# Altium PCB 0.PCB1.PcbDoc (part 5 of 8)
Units mil, origin at the board's own origin, x right, y up, seen from the top; angles counter-clockwise.
Board outline 3897.64 x 3897.64 mil, 6 copper layers (Top Layer, Layer 1, Layer 3, Layer 4, Layer 2, Bottom Layer), stack 60.567 mil thick; 715 components, 563 nets, 2530 pads, 1442 vias.
Unrouted connection lines stored in the file: 6.
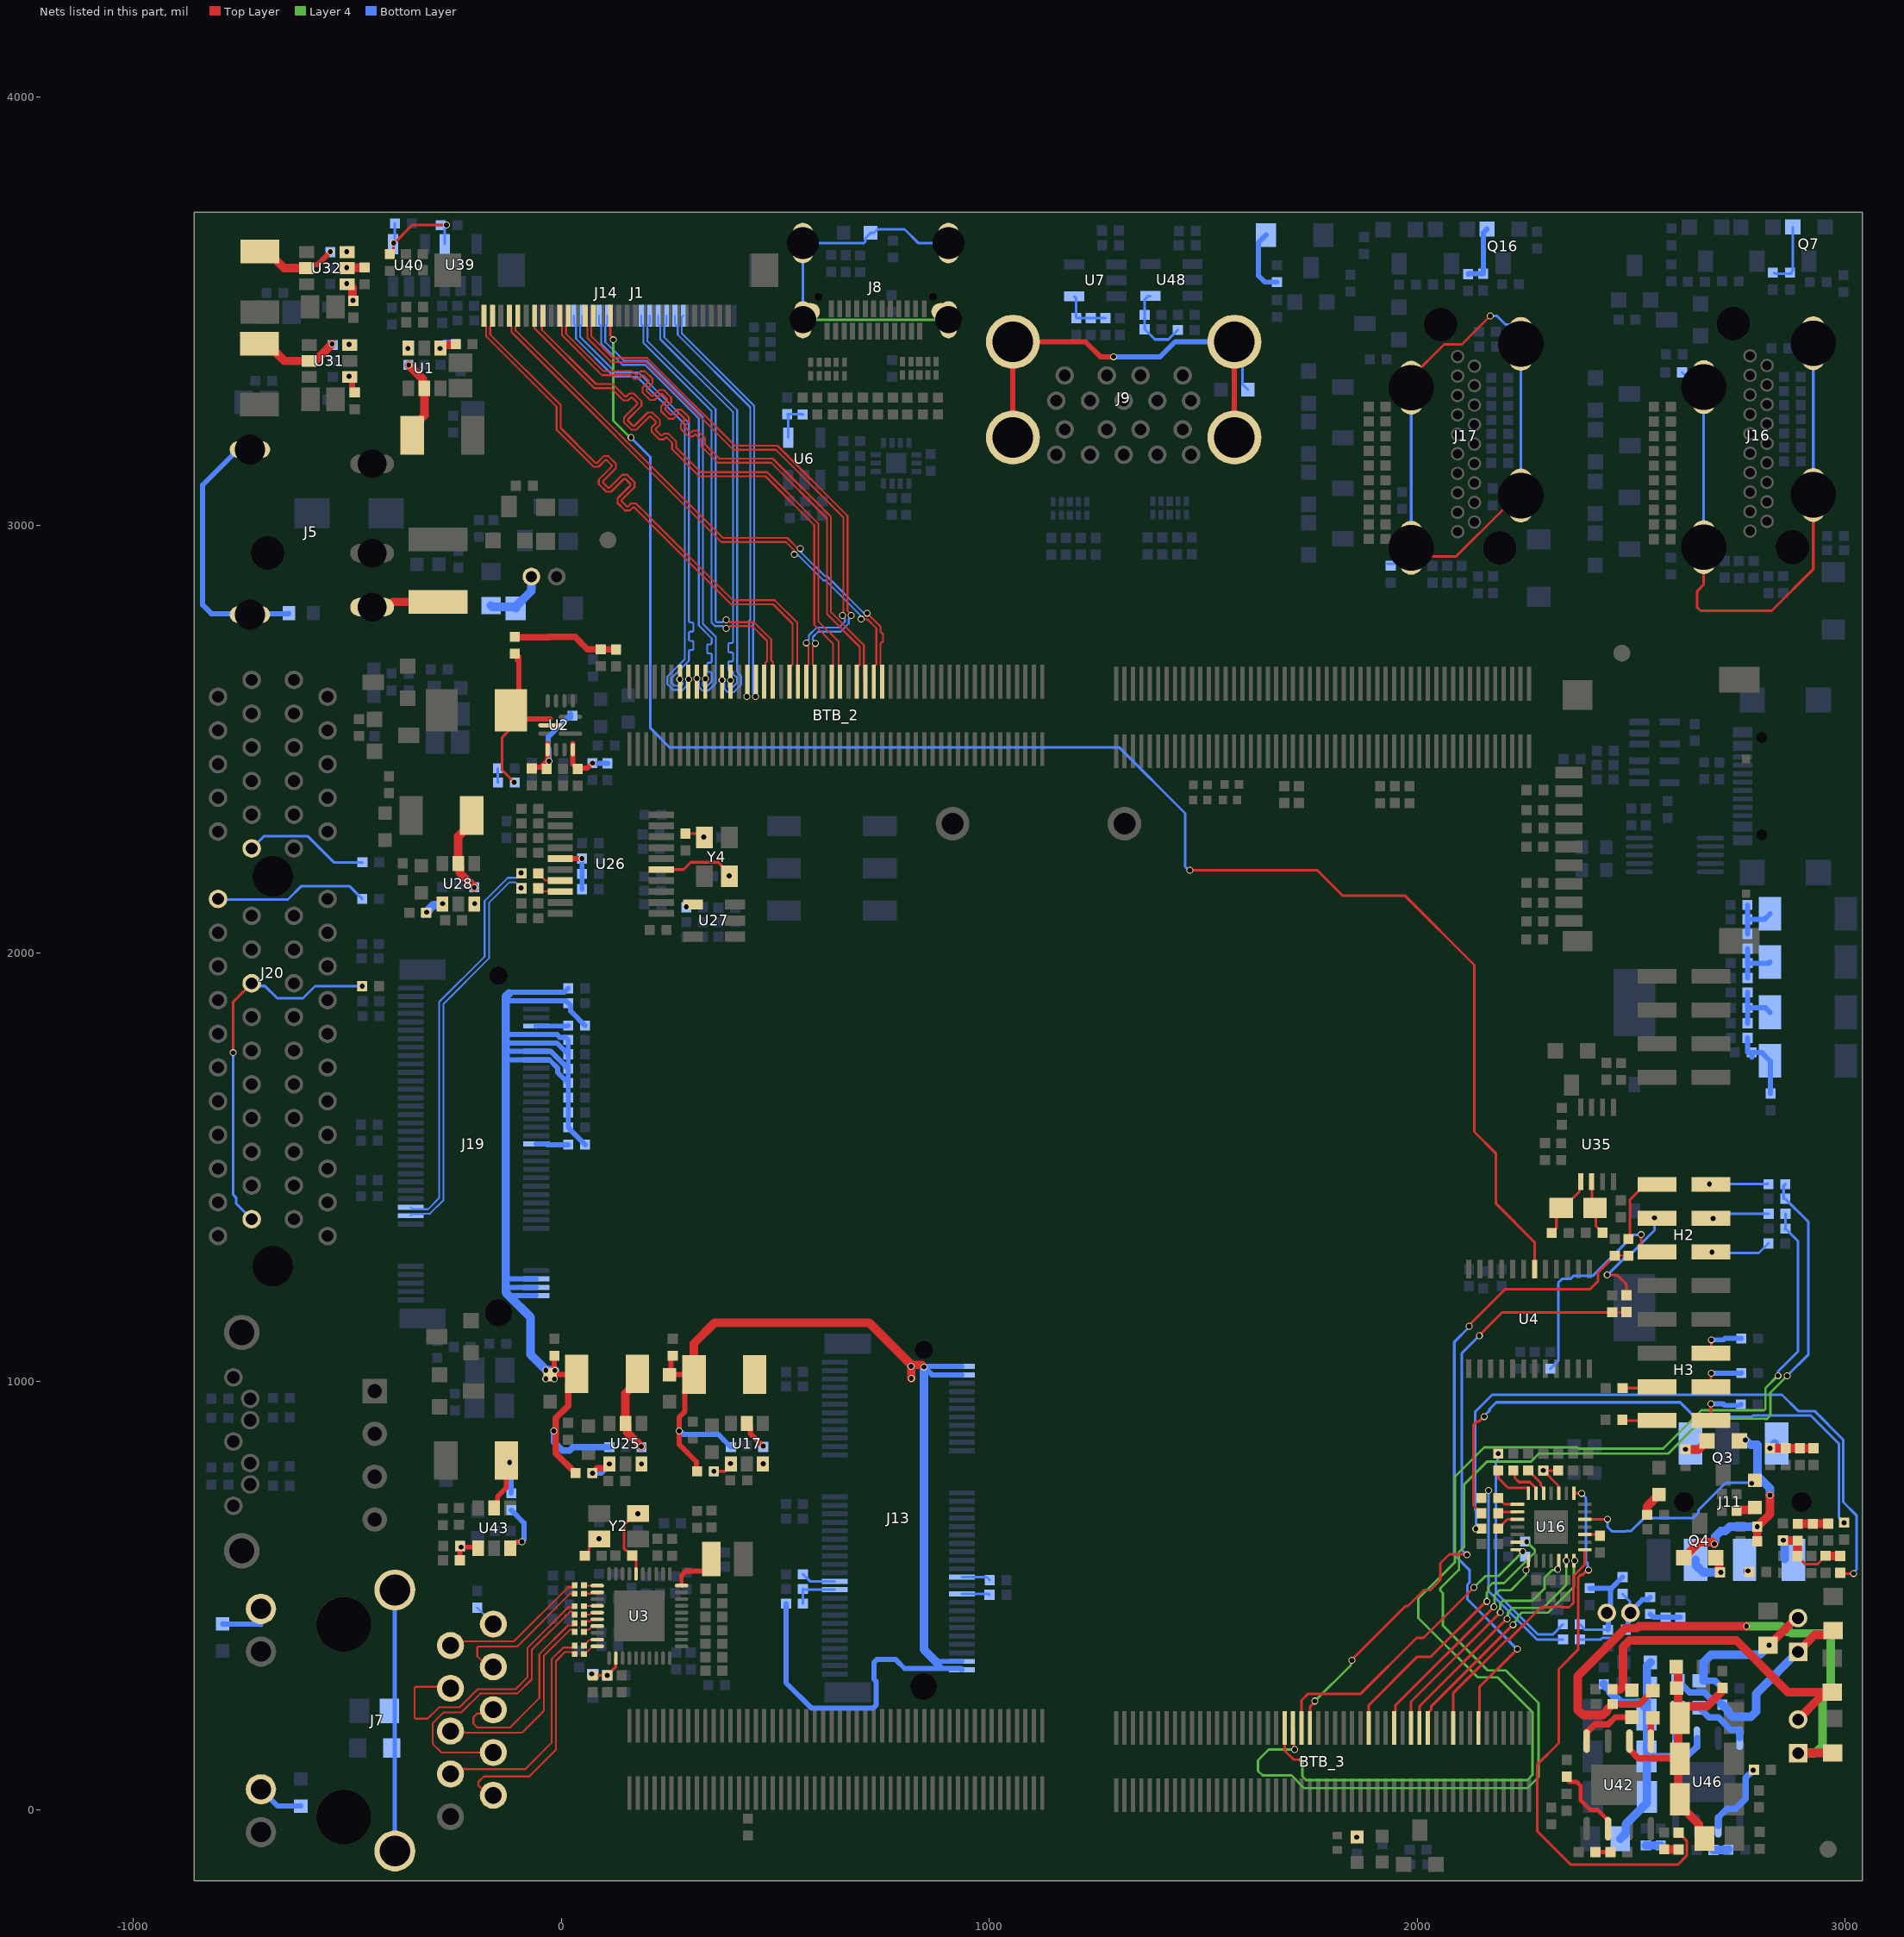
[diagram p9: the nets of this part, all layers, seen from the top]

## Via types
v1: diameter 16.14, hole 11.81, Top Layer to Bottom Layer, tented both sides, 1434 vias
v2: diameter 16.14, hole 11.81, Top Layer to Bottom Layer, 8 vias

## Nets (pads, with @x,y where several pads share a name; then routed paths per layer and width w, separated by ;. In a path a pad name is that pad's centre, name@x,y a point inside that pad or via, vN(x,y) a via of type N, cw(c..) or ccw(c..) an arc to the next point about the centre after c; other vN are vias at no path point) (continued)
I2C5_SCL_M3: BTB_3.24 R27.2 R111.2 | length 1495.4
  Top Layer w4: R27.2@2455.6,1161.52 2488.6,1161.52 R111.2@2489,1161.92
  Top Layer w6.16: BTB_3.24@1749.24,190.65 1749.76,191.17 1749.76,240.35 1761.2,251.79 v1(1761.2,253.4) ; v1(1847.2,348.22) 1847.2,349.7 1973,475.5 1978.4,475.5 2015.5,512.6 2030.7,512.6 2054.1,536 2054.1,575.1 2075.15,596.15 2114.85,596.15 v1(2116.2,594.8) ; v1(2145.1,1106.6) 2145.1,1107.6 2199.02,1161.52 R27.2@2455.6,1161.52
  Layer 4 w5.61: v1(1761.2,253.4) 1845.18,337.38 1845.18,346.21 v1(1847.2,348.22)
  Bottom Layer w6.16: v1(2116.2,594.8) 2104,607 2104,1065.5 v1(2145.1,1106.6)
I2C5_SDA_M3: BTB_3.44 R28.2 R194.2 | length 1490.2
  Top Layer w4: R28.2@2467.5,1293.7 2467.68,1293.52 R194.2@2500.7,1293.52
  Top Layer w6.16: v1(2121.4,1129) 2121.4,1131.1 2205.7,1215.4 2403.8,1215.4 2422.1,1233.7 2422.1,1253.62 R28.2@2461.7,1293.22 ; BTB_3.44@2145.3,209.2 2145.3,286 v1(2233.8,374.5)
  Bottom Layer w6.16: v1(2121.4,1129) 2121.4,1126.84 2086.6,1092.04 2086.6,595.2 2122.14,559.66 2122.14,529.79 2117.44,525.09 2117.44,490.86 v1(2233.8,374.5)
I2C7_SCL_M0: BTB_3.23 R29.2 U16.28 | length 740.2
  Top Layer w6.16: BTB_3.23@1729.56,190.65 1729.56,254.96 1745.02,270.42 1868.08,270.42 1998.68,401.02 2014.79,401.02 v1(2132.59,518.81) ; U16.28@2234.23,606.77 2243.11,606.77 2246.61,603.27 v1(2246.61,602.03)
  Layer 4 w5.61: v1(2132.59,518.81) 2159.27,545.5 2190.08,545.5 v1(2246.61,602.03)
I2C7_SDA_M0: BTB_3.31 R30.2 U16.27 | length 661.3
  Top Layer w6.16: BTB_3.31@1887.04,190.65 1887.04,243.77 2000.17,356.9 2031.8,356.9 2160.89,485.99 v1(2163.11,485.99) ; U16.27@2234.23,624.49 2254.89,624.49 v1(2255.7,625.3)
  Layer 4 w5.61: v1(2163.11,485.99) 2162.7,486.39 2162.7,506.39 2166.11,509.8 2166.11,519.51 2175.6,529 2202.8,529 2275.08,601.28 2275.08,605.92 v1(2255.7,625.3)
I2C8_SCL_M2: BTB_3.21 R31.2 R110.1 | length 2858.4
  Top Layer w5.61: BTB_3.21@1690.3,195.7 1690.3,137.3 1711.2,116.4 v1(1731.5,116.4)
  Layer 4 w5.61: v1(1731.5,116.4) 1731.5,77.8 1740.4,68.9 2257,68.9 2269.4,81.3 2269.4,227.2 2187.9,308.7 2141.2,308.7 2002.6,447.3 2002.6,492.4 2087.89,577.69 2087.89,777.19 2156.88,846.18 2374.28,846.18 2377.47,843 2574.8,843 2664.3,932.5 2810.11,932.5 2813.4,935.79 2813.4,983.98 v1(2842.9,1013.48)
  Bottom Layer w6.16: v1(2842.9,1013.48) 2842.9,1023 2889.7,1069.8 2889.7,1327.8 R31.2@2860.5,1357 ; R31.2@2858.1,1355.7 2860.38,1357.98 R110.1@2860.38,1391.7
I2C8_SDA_M2: BTB_3.22 R32.2 R193.1 | length 3065.3
  Top Layer w6.16: BTB_3.22@1709.5,191.5 1711.59,189.41 1711.59,142.21 v1(1713.3,140.5)
  Layer 4 w5.61: v1(1713.3,140.5) 1712.8,140 1652.9,140 1628.1,115.2 1628.1,90.1 1638.7,79.5 1706.4,79.5 1736,49.9 2257.2,49.9 2283.2,75.9 2283.2,248.5 2206.7,325 2164.8,325 2060.1,429.7 2060.1,505.7 2054.02,511.78 2054.02,516.42 2097.5,559.9 2097.5,601.1 2109.7,613.3 2109.7,759 2163.21,812.51 2265.82,812.51 2284.82,831.51 2587.11,831.51 2668.4,912.8 2812.6,912.8 2812.78,912.62 2817.42,912.62 2825.39,920.59 2825.39,974.19 v1(2864.5,1013.3)
  Bottom Layer w6.16: R32.2@2855.9,1426.7 2855.9,1456.82 R193.1@2859.88,1460.8 ; R32.2@2859.8,1426.7 2914,1372.5 2914,1062.8 v1(2864.5,1013.3)
I2S0_LRCK: BTB_3.38 U16.7 | length 569
  Top Layer w6.16: BTB_3.38@2024.83,190.65 2024.83,225.1 2032.52,232.79 2032.52,240.52 v1@2223.58,431.58
  Layer 4 w5.61: v1(2223.62,431.58) 2223.62,433.51 2234.81,444.7 2234.81,450.71 2243.91,459.81 2305.81,459.81 2366.12,520.12 2366.12,579.22 v1(2368.08,581.18)
I2S0_MCLK: BTB_3.34 U16.1 | length 536.3
  Top Layer w6.16: BTB_3.34@1946.09,190.65 1947.94,192.49 1947.94,229.64 1948.85,230.55 1948.85,242.85 v1(2179.2,473.2) ; v1(2254.4,558.8) 2256.31,560.71 2256.31,565.39 2259.82,568.9 U16.1@2259.82,581.18
  Layer 4 w5.61: v1(2179.2,473.2) 2180.88,474.88 2180.88,501.28 2191.7,512.1 2218.7,512.1 2254.4,547.8 v1(2254.4,558.8)
I2S0_SCLK: BTB_3.36 U16.5 | length 561.3
  Top Layer w6.16: BTB_3.36@1985.46,190.65 1985.46,251.72 v1(2194.24,460.49)
  Layer 4 w5.61: v1(2194.24,460.49) 2194.08,460.65 2194.08,481.38 2200.2,487.5 2268.86,487.5 2297.5,516.14 2297.5,541.5 2315.5,559.5 2326.47,559.5 v1(2328.24,561.27)
  Bottom Layer w6.16: v1(2328.24,561.27) v1@2329.6,562.63
I2S0_SDI0: BTB_3.41 U16.8 | length 586.4
  Top Layer w6.16: BTB_3.41@2083.89,190.65 2083.89,271.52 2207.82,395.45 2212.65,395.45 2289.58,472.38 2318.73,472.38 2320.73,474.38 2334.87,474.38 2336.87,472.38 2354.93,472.38 2364.69,482.14 2364.69,544.99 2391.71,572.01 U16.8@2391.71,606.77
I2S0_SDO0: BTB_3.37 U16.6 | length 574.6
  Top Layer w6.16: BTB_3.37@2005.15,190.65 2005.15,240.95 v1(2209.7,445.5)
  Layer 4 w5.61: v1(2209.7,445.5) 2211.72,447.52 2211.72,460.02 2222.45,470.75 2294.05,470.75 2348.4,525.1 v1(2348.4,581.18)
LCD0_RST: J14.15 U4.18 | length 4002.7
  Top Layer w6.16: J14.15@115.13,3489.52 115.13,3442.77 122,3435.9 v1(122,3433.2) ; v1(1469.2,2194) 1766.6,2194 1826.3,2134.3 1971.9,2134.3 2133.6,1972.6 2133.6,1583.1 2183.5,1533.2 2183.5,1416.1 2274.58,1325.02 U4.18@2274.58,1259.48
  Layer 4 w5.61: v1(122,3433.2) 122,3244.1 160.94,3205.16 v1(163.46,3205.16)
  Bottom Layer w6.16: v1(163.46,3205.16) 163.46,3204.14 207.9,3159.7 207.9,2526.8 253.81,2480.89 1304.21,2480.89 1457.9,2327.2 1457.9,2202.08 1461.51,2198.47 1462.03,2198.47 1466.5,2194 v1(1469.2,2194)
LOUT1: C122.1 U16.12 | length 476.7
  Top Layer w6.16: U16.12@2391.71,677.64 2392,677.93 2444.41,677.93 v1(2444.71,678.22) ; v1(2781.24,761.89) 2781.24,762.17 2780.15,763.26 2785.51,768.62 C122.1@2788.81,768.62
  Bottom Layer w6.16: v1(2444.71,678.22) 2444.71,660.32 2455.81,649.22 2486.51,649.22 2487.91,650.62 2499.55,650.62 2529.46,680.54 2644.34,680.54 2657,693.2 2657,699.61 2720.65,763.26 2780.15,763.26 2781.24,762.17 v1(2781.24,761.89)
LOUT2: C279.1 U16.15 | length 1319.6
  Top Layer w6.16: U16.15@2366.12,738.66 v1(2384.12,738.66) ; v1(2400.49,559.37) 2397.79,559.37 2386.9,548.48 2382.54,548.48 2375.89,541.82 2375.89,373 2330.61,327.72 2330.61,155.25 2280.71,105.35 2280.71,-50.99 2358.41,-128.69 2609.16,-128.69 2629.59,-108.26 2629.59,-73.05 C279.1@2610.71,-54.17
  Bottom Layer w6.16: v1(2384.12,738.66) 2394.31,728.47 2394.31,579.76 2398.58,575.48 2398.58,561.28 v1(2400.49,559.37)
M2EKEY_3V3: C128.2 C129.1 C130.1 J13.2 J13.4 J13.72 J13.74 L25.2 R138.2 R147.1 | length 2871.9
  Top Layer w12: C129.1@256.87,1017.9 256.97,1018 256.97,1056.32 C130.1@260.77,1060.12 ; C129.1@261.17,1016.5 261.97,1015.7 310.03,1015.7 L25.2@310.23,1015.9 ; L25.2@309.07,997.1 288.67,976.7 288.67,929.3 276.07,916.7 v1(276.07,884.57) 276.07,852.44 315.69,812.82 315.69,791.76 R138.2@317.41,790.05
  Top Layer w20: L25.2@310.23,1015.9 310.23,1088.73 358.8,1137.3 719.3,1137.3 817.83,1038.77 v1@842.93,1038.77 ; v1(817.8,1035.5) 818,1035.3 v1(818,1006.9)
  Bottom Layer w12: v1(276.07,884.57) 277,884.57 285.17,876.4 366.87,876.4 379.5,863.78 379.5,863.46 C128.2@396.5,846.46 ; R147.1@525.61,480.75 525.61,295.89 584.5,237 729.27,237 736.3,244.03 736.3,298.56 730.5,304.36 730.5,343.37 737.53,350.4 781.5,350.4 802.4,329.5 891.8,329.5 ; v1(848,1033.7) v1@848.21,1033.7 ; J13.74@935.6,326.49 936.35,326.49 J13.74@936.45,326.39 ; J13.74@935.6,329.5 891.8,329.5 ; J13.72@936.45,346.08 879.78,346.08 877.5,343.8 891.8,329.5 ; J13.4@936.45,1015.37 866.54,1015.37 v1@848.21,1033.7 ; J13.2@936.45,1035.06 850.48,1035.06 849.12,1033.7 v1@848.21,1033.7
  Bottom Layer w20: v1(848,1033.7) 848,373.3 877.5,343.8
M2PCIE_3V3: C157.2 C158.1 C159.1 C169.1 C170.1 C171.1 C172.1 C173.1 C174.1 C181.1 C182.1 C183.1 J19.2 J19.4 J19.12 J19.14 J19.16 J19.18 J19.70 J19.72 J19.74 L16.2 R218.2 R236.2 R237.2 | length 2971.7
  Top Layer w12: C159.1@-15.9,1060.12 -15.9,1031.55 -15.39,1031.04 C158.1@-15.39,1027.61 ; v1(-14.6,1025.7) -16.1,1025.7 C158.1@-26,1015.8 L16.2@34.46,1015.8
  Top Layer w15: C157.2@33.74,785.8 -13.1,832.64 -13.1,913.84 16.2,943.14 16.2,997.54 34.46,1015.8 L16.2@36.26,1017.6
  Bottom Layer w12: -129.5,1220.9 -128.45,1219.85 J19.72@-58.2,1219.85 ; -129.5,1241.7 -127.34,1239.54 J19.70@-58.2,1239.54 ; -129.5,1752.7 -128.15,1751.35 J19.18@-58.2,1751.35 -58.11,1751.26 -27.23,1751.26 -8.3,1732.33 -8.3,1721.93 C173.1@16.42,1697.2 ; -129.5,1772.7 -127.84,1771.04 J19.16@-58.2,1771.04 -58.11,1770.94 -23.82,1770.94 C171.1@16.42,1730.7 ; -129.5,1787 -125.78,1790.72 J19.14@-58.2,1790.72 -10.1,1790.72 C174.1@16.42,1764.2 ; -129.5,1807.5 -126.59,1810.41 -90.38,1810.41 ; -129.5,1898.7 -119.95,1889.15 J19.4@-58.2,1889.15 -58.11,1889.06 11.07,1889.06 C170.1@16.42,1883.7 22.22,1877.9 22.22,1864.76 R236.2@55.78,1831.2 ; -121.8,1906.4 -119.37,1908.83 J19.2@-58.2,1908.83 7.06,1908.83 C169.1@16.42,1918.2 ; -120.62,1198.98 -119.43,1200.17 J19.74@-58.2,1200.17 ; -90.38,1810.5 -58.3,1810.5 J19.12@-58.2,1810.41 -9.69,1810.41 -2.78,1803.5 10.63,1803.5 C172.1@16.42,1797.7 16.53,1797.59 16.53,1593.91 C183.1@16.64,1593.8 22.44,1588 22.44,1586.56 R237.2@55.9,1553.1
  Bottom Layer w15: v1(-17,884.3) -16.78,884.08 -16.78,858.68 3.3,838.6 19.9,838.6 27.82,846.52 R218.2@112.8,846.52
  Bottom Layer w20: -121.8,1906.4 -129.5,1898.7 -129.5,1807.5 -129.5,1787 -129.5,1772.7 -129.5,1752.7 -129.5,1241.7 -129.5,1220.9 -129.5,1207.86 -120.62,1198.98 -71.22,1149.58 -71.22,1062.72 -35.78,1027.28 v1(-35.78,1026.4) -15.3,1026.4 v1(-14.6,1025.7)
  other v1: -35.9,1005.9 -15.8,1005.6
M2PCIE_REF_CLKN: J19.53 R229.2 R231.1 | length 930.5
  Bottom Layer w4.29: J19.53@-351.5,1406.86 -347.74,1403.1 -321.55,1403.1 -320.62,1402.16 -310.94,1402.16 -284.94,1428.16 -284.94,1886.31 -178.9,1992.35 -178.9,2122.05 -124.46,2176.49 -105.05,2176.49 -104.56,2176.98 -102.53,2176.98 -94.08,2185.43 v1(-94.08,2187.73)
M2PCIE_REF_CLKN_R: R229.1 U26.17 | length 58.2
  Top Layer w4.29: R229.1@-53.52,2186.63 -36.91,2170.02 U26.17@-2.19,2170.02
M2PCIE_REF_CLKP: J19.55 R228.2 R232.1 | length 930.1
  Bottom Layer w4.29: J19.55@-351.5,1387.18 -347.74,1390.94 -321.55,1390.94 -320.62,1391.87 -306.67,1391.87 -274.65,1423.9 -274.65,1882.05 -168.61,1988.09 -168.61,2117.79 -120.2,2166.2 -107.55,2166.2 -102.63,2161.29 -102.53,2161.29 -94.08,2152.83 v1(-94.08,2152.73)
M2PCIE_REF_CLKP_R: R228.1 U26.18 | length 54.3
  Top Layer w4.29: R228.1@-53.52,2151.63 -46.32,2144.43 U26.18@-2.19,2144.43
MDIN0_PHY1: R374.1 U3.2 | length 32.4
  Top Layer w4.29: R374.1@53.36,504.2 68.83,504.2 71.86,507.23 U3.2@84.46,507.23
MDIN0_PHY1_RJ45: J7.3 R374.2 | length 346.7
  Top Layer w4.29: J7.3@-158.9,334.4 -172.23,334.4 -195.8,357.97 -195.8,378.39 -193.29,380.9 -102.25,380.9 20.89,504.04 31.54,504.04 R374.2@31.7,504.2
MDIN1_PHY1: R376.1 U3.5 | length 33.1
  Top Layer w4.29: R376.1@53.36,455.1 66.98,455.1 71.86,459.98 U3.5@84.46,459.98
MDIN1_PHY1_RJ45: J7.7 R376.2 | length 680.7
  Top Layer w4.29: J7.7@-158.48,133.13 -279.55,133.13 -300.4,153.98 -300.4,200.9 -274.33,226.97 -232.7,226.97 -188.9,270.77 -102.1,270.77 -68.6,304.28 -68.6,372.9 20.36,461.86 24.94,461.86 R376.2@31.7,455.1
MDIN2_PHY1: R378.1 U3.7 | length 36.7
  Top Layer w4.29: R378.1@53.36,415 58.1,419.74 64.29,419.74 73.04,428.49 U3.7@84.46,428.49
MDIN2_PHY1_RJ45: J7.6 R378.2 | length 468.6
  Top Layer w4.29: J7.6@-258.48,183.13 -254.75,179.4 -91.35,179.4 -43.28,227.47 -43.28,227.83 -40.7,230.41 -40.7,358.69 20.41,419.8 24.44,419.8 24.5,419.74 26.95,419.74 R378.2@31.7,415
MDIN3_PHY1: R380.1 U3.10 | length 38.6
  Top Layer w4.29: R380.1@53.36,363.1 60.32,370.07 62.8,370.07 73.97,381.24 U3.10@84.46,381.24
MDIN3_PHY1_RJ45: J7.9 R380.2 | length 542.8
  Top Layer w4.29: J7.9@-169.1,31.8 -193.3,56 -193.3,64.6 -180.69,77.21 -74.64,77.21 -12.3,139.56 -12.3,346.55 9.11,367.95 24.44,367.95 24.55,367.84 26.95,367.84 R380.2@31.7,363.1 ; J7.9@-158.5,5 J7.9@-144.42,19.08 ; J7.9@-158.48,33.13 J7.9@-154.14,28.8
MDIP0_PHY1: R373.1 U3.1 | length 31.5
  Top Layer w4.29: R373.1@53.36,523.9 54.28,522.98 U3.1@84.46,522.98
MDIP0_PHY1_RJ45: J7.2 R373.2 | length 348.5
  Top Layer w4.29: J7.2@-258.48,383.13 -248.52,393.09 -109.86,393.09 16.21,519.15 26.95,519.15 R373.2@31.7,523.9
MDIP1_PHY1: R375.1 U3.4 | length 31.4
  Top Layer w4.29: R375.1@53.36,474.9 54.19,475.73 U3.4@84.46,475.73
MDIP1_PHY1_RJ45: J7.4 R375.2 | length 674.3
  Top Layer w4.29: J7.4@-266.9,286 -267.6,286.7 -340.19,286.7 -342.7,284.19 -342.7,214.51 -340.19,212 -312.3,212 -285.7,238.6 -237.66,238.6 -195.2,281.06 -106.37,281.06 -78.89,308.54 -78.89,377.16 16.1,472.15 28.95,472.15 R375.2@31.7,474.9 ; J7.4@-258.48,283.13 J7.4@-256.41,281.06
MDIP2_PHY1: R377.1 U3.6 | length 35
  Top Layer w4.29: R377.1@53.36,434.9 58.1,439.64 67.26,439.64 71.86,444.24 U3.6@84.46,444.24
MDIP2_PHY1_RJ45: J7.5 R377.2 | length 458.5
  Top Layer w4.29: J7.5@-169.6,232.1 -177.41,224.29 -196.41,224.29 -205,215.7 -205,200.9 -195.7,191.6 -119.69,191.6 -78.16,233.13 -50.99,260.3 -50.99,362.96 16.15,430.09 24.44,430.09 24.5,430.15 26.95,430.15 R377.2@31.7,434.9
MDIP3_PHY1: R379.1 U3.9 | length 36.9
  Top Layer w4.29: R379.1@53.36,383.1 66.42,396.16 83.62,396.16 U3.9@84.46,396.99
MDIP3_PHY1_RJ45: J7.8 R379.2 | length 528.9
  Top Layer w4.29: J7.8@-258.48,83.13 -247.31,94.3 -83.75,94.3 -22.59,155.46 -22.59,350.81 4.84,378.24 24.44,378.24 24.55,378.36 26.95,378.36 R379.2@31.7,383.1
MIC1N: C113.2 R117.2 | length 1325.2
  Top Layer w6.16: C113.2@2149.95,691.98 2131.07,710.86 2131.07,897.57 2139.56,906.06 2143.91,906.06 2155.68,917.83 v1(2156.62,917.83)
  Bottom Layer w6.16: v1(2156.62,917.83) 2156.62,919.53 2169.24,932.15 2169.24,935.74 2184.7,951.2 2614.41,951.2 2648.45,917.16 2781.96,917.16 2785.46,920.66 2918.97,920.66 2985.35,854.28 2985.35,682.62 2997.21,670.76 v1(2997.21,670)
MIC1P: C112.2 R114.2 | length 1554.3
  Top Layer w6.16: R114.2@2988.21,552.84 2989.73,551.32 v1(3019.71,551.32)
  Bottom Layer w6.16: v1(2136.9,655.5) 2137.2,655.8 2137.2,698.1 2135.6,699.7 2135.6,929.3 2175.1,968.8 2852.3,968.8 2890.28,930.82 2928.21,930.82 2995.51,863.52 2995.51,718.22 3026.31,687.42 3026.31,559.92 3019.71,553.32 v1(3019.71,551.32)
MIC2N: C117.2 R134.2 | length 533.6
  Bottom Layer w6.16: v1(2189.41,831.31) 2187.5,829.4 2187.5,814.44 2183.98,810.92 2183.98,620.73 2183.68,620.43 2183.68,507.42 2282.1,409 2317.28,409 R134.2@2340.63,432.35
MIC2P: C115.2 R130.2 | length 455.9
  Bottom Layer w6.16: v1(2166.78,745.08) 2166.78,509.85 2279.38,397.25 R130.2@2340.83,397.25
MIPI_DPHY0_RX_CLKN: BTB_2.13 J1.10 | length 1014
  Top Layer w4.42: BTB_2.13@395.71,2634.65 395.9,2634.84 v1(395.9,2637.6)
  Bottom Layer w4.42: J1.10@226.41,3489.66 226.41,3469.98 231.33,3465.05 231.33,3434.77 401.38,3264.72 401.38,2743.1 401.38,2727.25 398.79,2724.66 392.68,2724.66 390.53,2722.52 390.53,2705.38 392.68,2703.24 399.66,2703.24 401.8,2701.1 401.8,2683.96 399.66,2681.82 392.68,2681.82 390.53,2679.68 390.53,2662.54 392.68,2660.4 398.79,2660.4 401.38,2657.81 401.38,2655.6 401.38,2652.91 410.6,2643.69 410.6,2631.51 398.95,2619.86 393.44,2619.86 390.85,2622.45 390.85,2629.38 395.9,2634.43 v1(395.9,2637.6)
MIPI_DPHY0_RX_CLKP: BTB_2.12 J1.9 | length 1013.4
  Top Layer w4.42: v1(375.96,2637.86) 376.02,2637.79 BTB_2.12@376.02,2634.65
  Bottom Layer w4.42: J1.9@246.1,3489.66 246.1,3469.98 241.18,3465.05 241.18,3438.84 411.22,3268.8 411.22,2656.99 420.44,2647.77 420.44,2627.43 403.03,2610.02 389.36,2610.02 381.01,2618.38 381.01,2629.63 375.96,2634.68 v1(375.96,2637.86)
MIPI_DPHY0_RX_D0N: BTB_2.17 J1.12 | length 1035.4
  Top Layer w4.42: v1(385.9,2759.21) 389.07,2759.21 394.2,2764.35 446.65,2764.35 481.34,2729.66 481.34,2683.12 477.16,2678.94 477.16,2637.36 BTB_2.17@474.45,2634.65
  Bottom Layer w4.42: J1.12@187.04,3489.66 187.04,3469.98 192.15,3464.87 192.15,3454.55 192.48,3454.22 192.48,3442.38 192.15,3442.05 192.15,3426.15 351.32,3266.98 351.32,2772.45 359.43,2764.35 377.6,2764.35 382.73,2759.21 v1(385.9,2759.21)
MIPI_DPHY0_RX_D0P: BTB_2.18 J1.11 | length 1034
  Top Layer w4.42: v1(385.9,2778.9) 389.07,2778.9 394.2,2773.77 450.55,2773.77 490.76,2733.57 490.76,2684.58 494.13,2681.2 BTB_2.18@494.13,2634.65
  Bottom Layer w4.42: J1.11@206.73,3489.66 206.73,3469.98 201.57,3464.81 201.57,3458.45 201.9,3458.12 201.9,3438.48 201.57,3438.15 201.57,3430.06 360.74,3270.88 360.74,2776.36 363.33,2773.77 377.6,2773.77 382.73,2778.9 v1(385.9,2778.9)
MIPI_DPHY0_RX_D1N: BTB_2.15 J1.8 | length 1000.6
  Top Layer w4.42: v1(434.01,2600.1) 435.08,2601.16 BTB_2.15@435.08,2634.65
  Bottom Layer w4.42: J1.8@265.78,3489.66 265.78,3469.98 272.14,3463.62 272.14,3444.94 441.75,3275.33 441.75,2779.25 439.15,2776.65 439.15,2608.4 434.01,2603.27 v1(434.01,2600.1)
MIPI_DPHY0_RX_D1P: BTB_2.16 J1.7 | length 999.6
  Top Layer w4.42: v1(453.7,2600.1) 454.76,2601.16 BTB_2.16@454.76,2634.65
  Bottom Layer w4.42: J1.7@285.47,3489.66 281.77,3485.97 281.77,3463.91 281.56,3463.69 281.56,3448.84 451.17,3279.23 451.17,2775.35 448.57,2772.75 448.57,2608.4 453.7,2603.27 v1(453.7,2600.1)
MIPI_DPHY0_RX_D2N: BTB_2.10 J1.17 | length 1078
  Top Layer w4.42: BTB_2.10@336.65,2634.65 336.9,2634.9 v1(336.9,2640.9)
  Bottom Layer w4.42: J1.17@88.62,3489.66 88.62,3469.98 93.72,3464.87 93.72,3424.18 143.26,3374.64 196.14,3374.64 321.5,3249.28 321.5,2766.1 352,2735.6 352,2730.6 352,2724.45 349.41,2721.86 343.24,2721.86 341.1,2719.72 341.1,2702.58 343.24,2700.44 349.86,2700.44 352,2698.3 352,2681.16 349.86,2679.02 343.24,2679.02 341.1,2676.88 341.1,2659.74 343.24,2657.6 349.41,2657.6 352,2655.01 352,2652.8 352,2635.21 340.19,2623.4 333.78,2623.4 331.19,2625.98 331.19,2632.45 336.9,2638.16 v1(336.9,2640.9)
MIPI_DPHY0_RX_D2P: BTB_2.9 J1.16 | length 1078.1
  Top Layer w4.42: BTB_2.9@316.97,2634.65 317.25,2634.94 v1(317.25,2642.12)
  Bottom Layer w4.42: J1.16@108.3,3489.66 108.3,3469.98 103.14,3464.81 103.14,3428.08 147.16,3384.06 200.04,3384.06 330.92,3253.18 330.92,2770 361.42,2739.5 361.42,2631.31 344.09,2613.98 329.88,2613.98 321.77,2622.08 321.77,2634.43 317.25,2638.94 v1(317.25,2642.12)
MIPI_DPHY0_RX_D3N: BTB_2.8 J1.20 | length 1089.1
  Top Layer w4.42: BTB_2.8@297.4,2640.23 v1(297.64,2640.47)
  Bottom Layer w4.42: J1.20@29.56,3489.66 29.56,3469.98 34.72,3464.81 34.72,3436.18 123.76,3347.14 177.04,3347.14 289.1,3235.08 289.1,2687.43 248.18,2646.51 248.18,2628.6 261.23,2615.55 284.37,2615.55 292.81,2623.99 292.81,2632.48 297.64,2637.3 v1(297.64,2640.47)
MIPI_DPHY0_RX_D3P: BTB_2.7 J1.19 | length 1095.1
  Top Layer w4.42: v1(277.24,2640.01) 277.24,2635.01 BTB_2.7@277.6,2634.65
  Bottom Layer w4.42: J1.19@49.25,3489.66 49.25,3469.98 44.14,3464.87 44.14,3440.08 127.66,3356.56 180.94,3356.56 298.52,3238.98 298.52,2790.81 298.52,2775.47 301.11,2772.88 306.91,2772.88 309.05,2770.74 309.05,2753.6 306.91,2751.46 300.66,2751.46 298.52,2749.32 298.52,2732.18 300.66,2730.04 306.91,2730.04 309.05,2727.9 309.05,2710.76 306.91,2708.62 301.11,2708.62 298.52,2706.03 298.52,2683.53 297.39,2682.4 257.6,2642.61 257.6,2632.5 265.13,2624.97 280.47,2624.97 283.39,2627.89 283.39,2631.56 279.2,2635.75 v1@279.2,2641.3
MIPI_DPHY0_TX_CLKN: BTB_2.25 J14.24 | length 1400
  Top Layer w4.42: J14.24@-62.04,3489.52 J14.24@-62.04,3489.52 -62,3459.89 -51.44,3449.34 -51.44,3449.26 77.63,3320.19 116.69,3320.19 138.94,3297.94 145.21,3291.67 156.68,3291.67 163.04,3298.03 166.07,3298.03 178.18,3285.91 178.18,3282.88 146.68,3251.37 146.68,3240.54 164.31,3222.91 175.15,3222.91 206.19,3253.95 209.22,3253.95 221.34,3241.83 221.34,3238.8 211.66,3229.12 211.66,3218.29 229.29,3200.66 240.12,3200.66 243.91,3204.44 246.94,3204.44 259.05,3192.32 259.05,3189.29 259.05,3177.83 286.74,3150.14 322.39,3114.49 477.21,3114.49 591.34,3000.36 591.34,2767.26 635.4,2723.2 635.4,2674.4 634.64,2673.64 634.64,2637.36 BTB_2.25@631.93,2634.65
MIPI_DPHY0_TX_CLKP: BTB_2.26 J14.23 | length 1399
  Top Layer w4.42: J14.23@-42.35,3489.52 -44.78,3487.09 -44.78,3456.08 81.58,3329.72 116.85,3329.72 116.96,3329.61 120.59,3329.61 145.6,3304.6 149.11,3301.09 152.78,3301.09 159.14,3307.45 169.97,3307.45 187.6,3289.81 187.6,3278.98 156.1,3247.47 156.1,3244.44 168.21,3232.33 171.24,3232.33 202.29,3263.37 213.12,3263.37 230.76,3245.73 230.76,3234.9 221.08,3225.22 221.08,3222.19 233.19,3210.08 236.22,3210.08 240,3213.86 250.84,3213.86 268.47,3196.22 268.47,3185.39 268.47,3181.73 293.4,3156.8 326.29,3123.91 481.11,3123.91 600.76,3004.26 600.76,2775.86 648.14,2728.47 648.14,2674.4 648.9,2673.64 648.9,2637.36 BTB_2.26@651.61,2634.65
MIPI_DPHY0_TX_D0N: BTB_2.30 J14.27 | length 1316.6
  Top Layer w4.42: J14.27@-121.09,3489.52 -121.09,3469.84 -115.96,3464.71 -115.96,3451.06 374.22,2960.88 524.8,2960.88 543.21,2942.47 543.21,2933.39 v1(544.9,2931.7) ; v1(700.4,2780.7) 700.77,2780.33 715.64,2780.33 736.5,2759.47 736.5,2675.25 730.35,2669.1 BTB_2.30@730.35,2634.65
  Bottom Layer w4.42: v1(544.9,2931.7) 547.14,2929.46 554.38,2929.46 612.55,2871.29 617.42,2871.29 698.23,2790.48 698.23,2782.87 v1(700.4,2780.7)
MIPI_DPHY0_TX_D0P: BTB_2.31 J14.26 | length 1317.1
  Top Layer w4.42: J14.26@-101.41,3489.52 -101.41,3469.84 -106.54,3464.71 -106.54,3454.96 378.12,2970.3 528.7,2970.3 551.12,2947.88 556.77,2947.88 v1(559.02,2945.64) ; v1(714.68,2794.61) 745.92,2763.37 745.92,2753 745.92,2750.79 748.51,2748.2 749.9,2748.2 752.04,2746.06 752.04,2728.92 749.9,2726.78 748.51,2726.78 745.92,2724.19 745.92,2699.1 745.92,2673.22 750.04,2669.1 BTB_2.31@750.04,2634.65
  Bottom Layer w4.42: v1(559.02,2945.64) 561.24,2943.41 561.24,2935.91 616.45,2880.71 621.32,2880.71 705.18,2796.85 712.44,2796.85 v1(714.68,2794.61)
MIPI_DPHY0_TX_D1N: BTB_2.28 J14.21 | length 1400
  Top Layer w4.42: J14.21@-2.98,3489.52 -2.98,3469.84 2.18,3464.67 2.18,3443.53 95.32,3350.4 161.58,3350.4 163.35,3348.63 169.62,3342.35 181.09,3342.35 189,3350.27 192.03,3350.27 204.15,3338.15 204.15,3335.12 189.97,3320.95 189.97,3310.11 207.61,3292.48 218.44,3292.48 232.62,3306.65 235.65,3306.65 247.76,3294.54 247.76,3291.51 233.59,3277.33 233.59,3266.5 251.22,3248.86 262.06,3248.86 273.81,3260.62 276.84,3260.62 288.96,3248.5 288.96,3245.47 279.68,3236.2 279.68,3225.36 297.32,3207.73 308.15,3207.73 311.93,3211.51 314.96,3211.51 327.08,3199.4 327.08,3196.37 327.08,3184.9 335.74,3176.24 365.78,3146.2 490.5,3146.2 621,3015.7 621,2792.59 697.8,2715.79 697.8,2674.4 695.21,2671.81 693.7,2671.81 690.98,2669.1 BTB_2.28@690.98,2634.65
MIPI_DPHY0_TX_D1P: BTB_2.29 J14.20 | length 1397.7
  Top Layer w4.42: J14.20@16.7,3489.52 16.7,3469.84 11.6,3464.74 11.6,3447.44 99.22,3359.82 165.48,3359.82 170.01,3355.29 173.53,3351.77 177.19,3351.77 185.1,3359.69 195.93,3359.69 213.57,3342.05 213.57,3331.22 199.39,3317.05 199.39,3314.02 211.51,3301.9 214.54,3301.9 228.72,3316.07 239.55,3316.07 257.18,3298.44 257.18,3287.61 243.01,3273.43 243.01,3270.4 255.13,3258.28 258.16,3258.28 269.91,3270.04 280.74,3270.04 298.38,3252.41 298.38,3241.57 289.1,3232.3 289.1,3229.27 301.22,3217.15 304.25,3217.15 308.03,3220.93 318.86,3220.93 336.5,3203.3 336.5,3192.46 336.5,3188.8 342.4,3182.9 369.68,3155.62 494.4,3155.62 630.42,3019.6 630.42,2796.49 707.22,2719.69 707.22,2674.4 707.96,2673.66 707.96,2637.36 BTB_2.29@710.67,2634.65
MIPI_DPHY0_TX_D2N: BTB_2.22 J14.18 | length 1282.4
  Top Layer w4.42: J14.18@56.07,3489.52 56.07,3469.84 61.21,3464.7 61.21,3436.97 116.7,3381.48 196.9,3381.48 402.08,3176.3 501.6,3176.3 659.55,3018.35 659.55,2791.43 v1(657.61,2789.5) ; BTB_2.22@572.87,2634.65 572.87,2669.1 577.67,2673.89 577.67,2684.84 578.12,2685.29 578.12,2716.78 572.87,2722.03 v1(572.87,2725.2)
  Bottom Layer w4.42: v1@576.4,2727.5 575.38,2728.52 575.38,2730.35 578.68,2733.65 578.68,2742.73 596.73,2760.77 649.08,2760.77 662.75,2774.44 662.75,2781.19 657.61,2786.33 v1(657.61,2789.5)
MIPI_DPHY0_TX_D2P: BTB_2.23 J14.17 | length 1288.1
  Top Layer w4.42: J14.17@75.76,3489.52 75.76,3469.84 70.63,3464.7 70.63,3440.87 120.6,3390.9 200.8,3390.9 405.98,3185.72 505.5,3185.72 668.97,3022.26 668.97,2800.23 677.3,2791.9 v1(677.3,2789.5) ; BTB_2.23@592.56,2634.65 592.56,2669.1 587.77,2673.89 587.77,2715.22 593.91,2721.37 v1(593.91,2724.12)
  Bottom Layer w4.42: v1(593.91,2724.12) 593.91,2726.77 588.1,2732.57 588.1,2738.83 600.63,2751.35 652.98,2751.35 672.17,2770.54 672.17,2781.19 677.3,2786.33 v1(677.3,2789.5)
MIPI_DPHY0_TX_D3N: BTB_2.20 J14.30 | length 1396.3
  Top Layer w4.42: J14.30@-180.15,3489.52 -180.15,3469.84 -174.98,3464.67 -174.98,3441.28 -10.6,3276.9 -10.6,3223.1 69.85,3142.65 73.36,3139.14 76.12,3136.38 87.59,3136.38 103.26,3152.05 106.29,3152.05 118.41,3139.93 118.41,3136.9 88.1,3106.59 88.1,3095.76 105.73,3078.13 116.56,3078.13 146.88,3108.44 149.9,3108.44 162.02,3096.32 162.02,3093.29 131.71,3062.98 131.71,3052.15 149.35,3034.51 160.18,3034.51 167.25,3041.59 170.91,3041.59 193.09,3019.41 196.6,3015.9 397.12,2815.38 495.12,2815.38 540.6,2769.9 540.6,2674.4 538.01,2671.81 536.22,2671.81 533.5,2669.1 BTB_2.20@533.5,2634.65
MIPI_DPHY0_TX_D3P: BTB_2.21 J14.29 | length 1432.6
  Top Layer w4.42: J14.29@-160.45,3489.52 -160.45,3469.84 -165.56,3464.73 -165.56,3445.19 -1.18,3280.8 -1.18,3227 76.51,3149.31 80.02,3145.8 83.69,3145.8 99.36,3161.47 110.19,3161.47 127.83,3143.84 127.83,3133 97.52,3102.69 97.52,3099.66 109.63,3087.54 112.66,3087.54 142.97,3117.86 153.81,3117.86 171.44,3100.22 171.44,3089.39 141.13,3059.08 141.13,3056.05 153.25,3043.93 156.28,3043.93 163.35,3051.01 174.82,3051.01 199.75,3026.07 203.26,3022.56 401.02,2824.8 499.02,2824.8 551.5,2772.32 551.5,2636.34 BTB_2.21@553.19,2634.65 ; BTB_2.21@550.48,2637.36 BTB_2.21@550.48,2673.78 ; BTB_2.21@551.3,2663.6 BTB_2.21@553.19,2665.49
NetC4_1: C4.1 D2.2 R1.1 SW1.2 | length 182.3
  Bottom Layer w12: D2.2@2772,1802.5 2772.15,1802.35 2772.15,1768.75 2772.3,1768.6 R1.1@2781.58,1768.6 ; 2781.58,1757 R1.1@2781.58,1768.6 ; C4.1@2825.4,1672.78 2825.4,1747.73 SW1.2@2824.23,1748.9 2804.53,1768.6 R1.1@2781.58,1768.6
NetC5_1: C5.1 D3.2 R2.1 SW2.2 | length 128.8
  Bottom Layer w12: R2.1@2771.98,1836.6 D3.2@2771.98,1872.7 ; C5.1@2771.98,1908.8 D3.2@2771.98,1872.7 ; SW2.2@2824.23,1862.3 2813.83,1872.7 D3.2@2771.98,1872.7
NetC6_1: C6.1 U1.6
  other v1: -358.1,3413.07
NetC6_2: C6.2 L2.1 U1.2 | length 191.3
  Top Layer w20: v1(-355.9,3374.12) -323.38,3341.6 -323.38,3323.56 U1.2@-319.6,3319.78 -319.6,3256.14 -348.3,3227.44 L2.1@-348.3,3209.72
NetC7_1: C7.1 R4.1 R7.1 U1.4 | length 82.9
  Top Layer w20: v1(-283.3,3413.07) -283.3,3416.55 -278.42,3421.42 -248.06,3421.42 R4.1@-246.26,3423.22
  Bottom Layer w20: R7.1@-282.2,3414.27 -273.24,3423.22 C7.1@-246.26,3423.22
NetC14_1: C14.1 U32.6
  other v1: -501.07,3639.18
NetC14_2: C14.2 L21.1 U32.2 | length 195.7
  Top Layer w12: U32.2@-592.5,3600.8 -584.84,3608.46 -569.44,3608.46 v1(-539.2,3638.7)
  Top Layer w20: L21.1@-704.31,3639.67 -686.59,3639.67 -647.6,3600.68 U32.2@-594.35,3600.68
  Bottom Layer w12: C14.2@-539.23,3638.08 v1(-539.2,3638.7)
NetC15_1: C15.1 D4.2 R5.1 SW3.2 | length 122.1
  Bottom Layer w12: C15.1@2771.68,1942.4 2771.78,1942.5 R5.1@2771.78,1977 ; D4.2@2771.88,2010.9 2771.78,2010.8 R5.1@2771.78,1977 ; SW3.2@2824.23,1979.5 2821.73,1977 R5.1@2771.78,1977
NetC16_1: C16.1 R8.2 | length 33.1
  Bottom Layer w6.16: R8.2@-147.67,2432.09 -147.67,2399.29 C16.1@-147.47,2399.09
NetC16_2: C16.2 L3.1 R10.1 U2.7 | length 402.3
  Top Layer w6.16: L3.1@-117.99,2524.29 -137.79,2504.49 -137.79,2427.79 v1(-109.59,2399.59)
  Top Layer w12: L3.1@-117.99,2524.29 L3.1@-95.19,2547.09 ; L3.1@-117.3,2567.4 L3.1@-117.3,2579.21 ; R10.1@-109.5,2703.3 -102.8,2696.6 -102.8,2685.9 -98.8,2681.9 ; R10.1@-100,2693.8 -98.8,2692.6 -98.8,2681.9 ; L3.1@-97.1,2602.2 -98.8,2603.9 -98.8,2681.9 ; L3.1@-86.59,2567.4 -86.59,2555.69 L3.1@-95.19,2547.09 ; -25.71,2547.09 L3.1@-95.19,2547.09
  Bottom Layer w6.16: v1(-109.59,2399.59) -109.09,2399.09 C16.2@-108.11,2399.09
NetC20_1: C20.1 R10.2 R13.2 | length 246.9
  Top Layer w15: R10.2@-104.5,2741.6 -104.5,2738.9 -104.3,2738.7 -27.4,2738.7 -27.1,2739 32.3,2739 61.32,2709.98 C20.1@92.6,2709.98 ; C20.1@93.5,2709.1 94.23,2709.83 127.85,2709.83 R13.2@128,2709.68
NetC25_1: C25.1 R14.1 R15.1 U2.9 | length 225.2
  Top Layer w12: R14.1@-68.16,2431.2 -64.41,2434.95 -46.93,2434.95 -34.79,2447.09 -34.3,2447.09 -33.51,2447.87 -28.71,2447.87 v1(-27.92,2448.67) ; v1@-31.62,2449.77 U2.9@-31.65,2475.7 U2.9@-31.62,2490
  Bottom Layer w12: v1(-27.92,2448.67) -27.92,2477.54 -30,2479.62 -30,2505.15 14.17,2549.32 21,2549.32 22.27,2550.59 R15.1@22.27,2559.65
NetC26_1: C26.1 R9.2 R16.1 U2.12 | length 137.8
  Top Layer w12: U2.12@27.44,2490 27.44,2441.89 36.52,2432.8 61.56,2432.8 v1(73.11,2444.35)
  Bottom Layer w12: v1(73.11,2444.35) 73.4,2444.06 108.02,2444.06 R16.1@108.31,2443.77
NetC28_1: C28.1 D6.2 R19.1 SW4.2 | length 125.9
  Bottom Layer w12: C28.1@2771.48,2113.03 2771.53,2112.98 R19.1@2771.53,2079.5 ; D6.2@2771.58,2045.1 D6.2@2771.58,2045.1 R19.1@2771.53,2079.5 ; SW4.2@2824.23,2092.1 2811.63,2079.5 R19.1@2771.53,2079.5
NetC54_1: C54.1 R387.1 Y2.1 | length 56.8
  Top Layer w6.16: R387.1@55.22,592.71 63.94,601.43 63.94,607.41 66.2,609.67 66.2,615.57 82.8,632.18 v1(88.71,632.18)
NetC55_1: C55.1 R386.2 U3.36 Y2.3 | length 171.2
  Top Layer w6.16: U3.36@175.02,550.54 175.02,584.1 153.7,605.41 150.74,605.41 146.59,609.56 146.59,663.74 156.75,673.9 156.75,674.63 173.35,691.24 v1(179.26,691.24)
NetC56_1: C56.1 J7.1 | length 53
  Bottom Layer w5.15: C56.1@-195.9,471.22 -160.1,435.42 J7.1@-160.1,433
NetC57_1: C57.1 J7.15 J7.16 R71.1 | length 609.8
  Bottom Layer w10: J7.16@-388.42,-133.22 J7.15@-388.42,476.62
NetC58_1: C58.1 D7.2 R69.2 R70.2 U3.12 | length 86.2
  Top Layer w6.16: v1(71.72,316.79) 75.23,313.28 v1(107.86,313.28) 127.29,332.71 127.29,353.2 U3.12@127.77,353.68
NetC86_1: C86.1 R93.2 U6.4 | length 92
  Bottom Layer w6.16: U6.4@530.6,3204.81 530.6,3256.93 C86.1@528.12,3259.4 563.82,3259.4 R93.2@564.3,3258.92
NetC89_1: C89.1 R33.2 R96.2 U7.4 | length 120.4
  Bottom Layer w6.16: U7.4@1198.79,3534.63 1203.4,3530.02 C89.1@1203.4,3484.11 R96.2@1237.43,3484.11 R33.2@1271.4,3484.11
NetC106_1: C106.1 C107.1 R112.1 U16.17 | length 103.3
  Top Layer w6.16: C106.1@2329.41,791.95 v1(2294.41,791.95) 2329.83,756.53 2329.83,739.52 U16.17@2330.69,738.66
NetC111_1: C111.1 R113.1 R115.1 | length 68.3
  Top Layer w20: R115.1@2889.01,667.4 R113.1@2924.31,667.4 2955.93,667.4 C111.1@2956.91,666.42
NetC112_1: C112.1 U16.24 | length 53.8
  Top Layer w6.16: C112.1@2189.31,656.21 2210.73,677.64 U16.24@2234.23,677.64
NetC113_1: C113.1 U16.23 | length 46.3
  Top Layer w6.16: C113.1@2189.31,691.98 2192.68,695.35 U16.23@2234.23,695.35
NetC115_1: C115.1 U16.22 | length 51
  Top Layer w6.16: C115.1@2189.31,727.75 2203.99,713.07 U16.22@2234.23,713.07
NetC116_1: C116.1 D82.2 J11.1 R114.1 R115.2 R116.1 | length 234.2
  Top Layer w6.16: R116.1@2888.51,592.6 2888.51,591.6 2901.93,578.18 2901.93,577.35 2906.07,573.2 2935.54,573.2 2939.89,577.56 2939.89,578.29 C116.1@2954.11,592.5
  Top Layer w20: D82.2@2854.41,628.62 2854.7,628.33 2889.22,628.33 2888.51,627.62 R116.1@2888.51,592.6 ; D82.2@2855.67,628.33 v1(2855.67,628.92) ; C116.1@2954.11,592.5 2954.26,592.35 2988.06,592.35 R114.1@2988.21,592.2
  Bottom Layer w20: v1(2855.67,628.92) 2858.54,626.05 J11.1@2858.54,584.77
NetC117_1: C117.1 U16.21 | length 109.5
  Top Layer w6.16: C117.1@2189.41,791.95 2189.41,774.63 2212.71,751.33 2258.96,751.33 2259.82,750.47 U16.21@2259.82,738.66
NetC118_1: C118.1 U16.20 | length 90.3
  Top Layer w6.16: C118.1@2224.41,791.95 2228.13,788.23 2228.13,774.52 2237.7,764.95 2263.23,764.95 2270.84,757.34 2270.84,757.17 2277.54,750.47 U16.20@2277.54,738.66
NetC119_1: C119.1 U16.19 | length 68.1
  Top Layer w6.16: C119.1@2259.41,791.95 2288.56,762.8 2288.56,757.16 2295.25,750.47 U16.19@2295.25,738.66
NetC120_1: C120.1 U16.10 | length 36.5
  Top Layer w6.16: U16.10@2391.71,642.2 2424.56,642.2 C120.1@2427.11,639.65
NetC122_2: C122.2 R122.2 | length 46.1
  Top Layer w20: R122.2@2746.11,697.44 2748.54,699.87 2783.06,699.87 C122.2@2788.81,705.62
NetC125_1: C125.1 R125.2 R126.1 | length 73.7
  Bottom Layer w12: R126.1@2544.35,456.54 2551.92,448.97 C125.1@2614.87,448.97
NetC126_1: C126.1 D83.2 P1.1 R126.2 R130.1 | length 265.9
  Bottom Layer w6.16: R130.1@2380.19,397.25 2428.82,397.25 2432.45,400.88 2468.26,400.88 D83.2@2487.61,420.23 ; C126.1@2479.61,503.52 2497.04,486.09 2497.04,460.33 P1.1@2498.17,459.2
  Bottom Layer w12: D83.2@2487.61,420.23 2492.89,425.51 2492.89,453.92 P1.1@2498.17,459.2 ; P1.1@2502.67,467 2503,467 2526.1,490.1 2538.55,490.1 R126.2@2544.35,495.9
NetC126_2: C126.2 D78.2 P1.2 R134.1 R136.1 | length 259.8
  Bottom Layer w6.16: R134.1@2379.99,432.35 2392.58,419.76 D78.2@2445.58,419.76
  Bottom Layer w12: R136.1@2403.05,517 2403.15,517.1 2454.79,517.1 ; D78.2@2445.58,419.76 2446.57,420.74 2446.57,466.02 2451.22,470.67 2451.22,513.53 2454.79,517.1 ; C126.2@2479.61,542.88 2454.79,518.07 2454.79,517.1
NetC127_1: C127.1 U17.6
  other v1: 472.01,807.81
NetC127_2: C127.2 L25.1 U17.2 | length 66.6
  Top Layer w12: U17.2@438.4,899.8 441.68,896.52 441.68,879.02 v1(471.9,848.8)
  Bottom Layer w12: v1(471.9,848.8) 472.01,848.69 C127.2@472.01,847.17
NetC128_1: C128.1 R138.1 R141.1 U17.4 | length 49.7
  Top Layer w6.16: v1(356.77,790.05) 383.38,790.05 395.46,802.12 v1(395.46,808.15)
NetC142_1: C142.1 Q7.1 R153.2 | length 146.7
  Bottom Layer w6.16: R153.2@2834.2,3589.89 2836.38,3587.71 C142.1@2874.1,3587.71 ; C142.1@2874.9,3592.11 2877.7,3594.91 Q7.1@2877.7,3696.81
NetC154_1: C154.1 Q16.1 R174.2 | length 143.6
  Bottom Layer w12: C154.1@2119,3586.82 2119.4,3587.22 2153.9,3587.22 R174.2@2154.3,3587.62 2154.3,3683.14 Q16.1@2163.1,3691.94
NetC156_1: C156.1 U25.6
  other v1: 187.6,807.16
NetC156_2: C156.2 L16.1 U25.2 | length 196.7
  Top Layer w20: L16.1@178,1017.6 178,999.88 150.2,972.08 U25.2@150.2,901.64 153.98,897.86 153.98,881.22 v1(187.4,847.8)
NetC157_1: C157.1 R218.1 R227.1 U25.4 | length 99.4
  Top Layer w15: v1(73.1,785.8) 84.24,796.94 106.52,796.94 112.8,803.22 v1(112.8,807.16)
  Bottom Layer w15: v1(73.1,785.8) 74.44,787.14 92.78,787.14 v1(112.8,807.16)
NetC164_1: C164.1 U26.5 Y4.1 | length 182
  Top Layer w6.16: U26.5@234.03,2195.61 271.13,2195.61 271.2,2195.68 285.93,2195.68 302.97,2212.73 366.74,2212.73 392.31,2187.16 v1(392.31,2181.16)
NetC165_1: C165.1 R230.1 Y4.3 | length 46.5
  Top Layer w6.16: R230.1@290.18,2279.93 325.03,2279.93 v1(333.25,2271.71)
NetC166_1: C166.1 C167.1 R235.2 U26.15 | length 122.9
  Top Layer w12: U26.15@-2.19,2221.2 48.4,2221.2 v1(48.7,2221.5)
  Bottom Layer w12: C167.1@48.7,2149.63 C166.1@48.7,2185.57 v1(48.7,2221.5)
NetC179_1: C179.1 U28.6
  other v1: -201.88,2116.06
NetC179_2: C179.2 L17.1 U28.2 | length 196.8
  Top Layer w20: L17.1@-208.81,2322.4 -208.81,2304.68 -240.38,2273.11 U28.2@-240.38,2209.34 -236.6,2205.56 -236.6,2187.84 v1(-202.98,2154.22)
NetC188_1: C188.1 U27.4
  other v1: 292.38,2108.23
NetC194_1: C194.1 R249.1 R250.1 U28.4 | length 47.8
  Bottom Layer w20: C194.1@-315.78,2095.1 -297.82,2113.06 -279.58,2113.06 R250.1@-277.78,2114.86 -276.68,2115.96 v1(-276.68,2116.06)
  other v1: -314.1,2096
NetC210_1: C210.1 C211.1 C218.1 C219.1 C278.1 R341.2 R342.2 U42.6 | length 711.7
  Top Layer w15: U42.6@2495.91,159.81 2495.91,140.33 2516.79,119.45 2608.51,119.45 C211.1@2609.61,118.35
  Top Layer w20: R341.2@2605.51,333.55 2609.61,329.45 2609.61,118.35 2609.61,27.95 C210.1@2613.71,23.85 2613.71,10.07 2658.23,-34.46 2658.23,-55.12 C219.1@2671.07,-67.95 ; C218.1@2613.71,213.45 2613.71,227.23 2627.33,240.85 2677.11,240.85 2711.21,274.95 2711.21,282.15 C278.1@2713.01,283.95
NetC224_1: C224.1 U31.6
  other v1: -495.45,3422.3
NetC224_2: C224.2 L20.1 U31.2 | length 202.5
  Top Layer w20: L20.1@-704.59,3423.87 -686.88,3423.87 -646.81,3383.8 U31.2@-588.74,3383.8 -584.96,3387.58 -571.06,3387.58 -557.02,3401.63 ; -557.02,3401.67 v1(-535.19,3423.5)
NetC225_1: C225.1 R36.1 R271.1 U31.4 | length 72.8
  Top Layer w12: U31.4@-487.99,3340.14 -487.99,3315.9 C225.1@-482.19,3310.1
  Bottom Layer w12: v1(-495.35,3348.31) -488.69,3341.65 -488.69,3316.6 -485.69,3313.6 R36.1@-484,3313.6
NetC232_1: C232.1 R272.1 R274.1 U32.4 | length 47.3
  Top Layer w20: v1(-501.07,3564.37) -497.03,3564.37 -487.01,3554.35 -487.01,3526.09 v1(-486.41,3525.49)
NetC239_1: C239.1 R273.1 U32.5 | length 42.3
  Top Layer w20: v1(-501.07,3601.78) -500.82,3601.53 -460.06,3601.53 C239.1@-459.21,3602.38
NetC240_1: C240.1 U35.1 Y5.1 | length 157.3
  Top Layer w6.16: C240.1@2314.42,1346.6 2325.3,1357.48 2325.3,1393.9 Y5.1@2336.5,1405.1 2340.44,1405.1 2379.09,1443.75 2379.09,1469.29 U35.1@2383,1473.2
NetC241_1: C241.1 U35.2 Y5.2 | length 135.9
  Top Layer w6.16: U35.2@2405.2,1469 2407.9,1466.3 2407.9,1412.5 Y5.2@2415.3,1405.1 ; Y5.2@2417.8,1408.6 2417.8,1362.58 C241.1@2433.18,1347.2
NetC259_1: C259.1 C262.1 R306.2 U39.4 U40.4 | length 268
  Top Layer w6.16: R306.2@-400.5,3633.58 -391.78,3642.3 -391.78,3659.04 v1(-391.35,3659.46) ; v1@-390.55,3658.66 -347.52,3701.7 v1(-268.1,3701.7)
  Bottom Layer w6.16: U40.4@-392.8,3656.41 U40.4@-390.55,3658.66 ; v1(-391.35,3659.46) U40.4@-390.55,3658.66 ; C262.1@-388.3,3705.2 -388.3,3660.91 U40.4@-390.55,3658.66 ; U39.4@-272.14,3657.1 -272.14,3697.66 v1(-268.1,3701.7)
NetC279_2: C279.2 R343.1 | length 34.2
  Top Layer w20: R343.1@2576.71,-93.13 2576.91,-93.33 2610.51,-93.33 C279.2@2610.71,-93.53
NetC283_1: C283.1 U43.6 | length 123.7
  Top Layer w12: U43.6@-119.02,610.32 -119.02,614.26 -111.24,622.04 -107.3,622.04 -104.47,624.88 -92.71,624.88 v1(-91.92,625.67)
  Bottom Layer w12: C283.1@-116.52,699.49 -101.48,684.45 -101.48,683.88 -87.12,669.52 -87.12,630.47 v1(-91.92,625.67)
NetC283_2: C283.2 L26.1 U43.2 | length 191.3
  Top Layer w12: U43.2@-156.42,704.81 -148.64,712.59 -148.64,731.3 -127.95,751.99 L26.1@-127.95,810.77
  Bottom Layer w12: v1(-120.52,810.77) -120.52,809.65 -116.52,805.65 C283.2@-116.52,738.85
NetC284_1: C284.1 R34.2 R324.2 U48.4 | length 182.3
  Bottom Layer w6.16: U48.4@1376.59,3535.53 1372.04,3535.53 1363.32,3526.81 R324.2@1363.32,3457.96 1387.25,3434.03 1418.42,3434.03 C284.1@1440.72,3456.33
NetC287_2: C287.2 R124.2 | length 58.6
  Top Layer w20: R124.2@2537.35,688.42 2537.56,688.63 2537.56,708.37 C287.2@2564.81,735.62
NetC288_1: C288.1 D81.2 J11.6 R119.2 R120.1 | length 116.8
  Top Layer w20: v1(2824.41,844) R119.2@2860.91,844 C288.1@2894.11,844 R120.1@2926.01,844
  Bottom Layer w20: v1(2824.41,844) J11.6@2835.16,854.75
NetC289_1: C289.1 Q3.1 Q4.1 R326.1 | length 497.8
  Top Layer w20: Q4.1@2622.51,588.22 2658.79,624.5 2690.34,624.5 v1(2694.63,620.22) ; R326.1@2794.39,626.52 2794.49,626.62 v1(2794.49,660.72) C289.1@2794.59,660.82 2809.64,675.87 2810.35,675.87 2824.01,689.52 v1(2824.01,734.32)
  Bottom Layer w20: v1(2694.63,620.22) 2694.63,624.5 2696.23,626.11 2696.23,637.56 2709.16,650.49 2719.88,650.49 2730.11,660.72 v1(2794.49,660.72) ; v1(2766.84,863.3) 2778.32,851.82 2795.21,851.82 2795.21,779.42 2824.01,750.62 v1(2824.01,734.32)
NetC290_1: C290.1 R316.1 R322.1 U43.4 | length 78.1
  Top Layer w12: R322.1@-236.72,582.07 -236.43,582.36 -236.43,615.18 C290.1@-236.14,615.47 v1(-233.57,612.9) -196.39,612.9 U43.4@-193.82,610.32
NetC299_2: C299.2 R344.1 | length 35.4
  Top Layer w10: C299.2@2416.41,-99.35 2416.56,-99.5 2451.58,-99.5 R344.1@2451.73,-99.65
NetC300_1: C300.1 J42.2 L27.2 R211.1 | length 772.5
  Top Layer w15: C300.1@2455.89,281.15 2457.14,279.9 2473.21,279.9
  Top Layer w20: 2473.21,279.9 2481.11,287.8 2481.11,379.85 2495.92,394.66 2745.74,394.66 2866.7,273.7 R211.1@2969.9,273.7 2959.9,263.7 2943.29,263.7 J42.2@2889.81,210.22
NetC301_1: C301.1 J42.1 L19.2 R210.1 | length 1341.3
  Top Layer w15: C301.1@2456.59,246.45 2519.31,246.45 L19.2@2550.21,277.35
  Top Layer w20: C301.1@2456.59,246.45 2443.03,232.89 2443.03,228.85 2434.63,220.45 2386.93,220.45 2375.21,232.16 2375.21,311.85 2486.91,423.55 2512.94,423.55 2517.69,428.3 v1(2769.34,428.3) ; J42.1@2889.81,131.48 2890.22,131.89 2970.29,131.89 R210.1@2970.7,132.3
  Layer 4 w20: v1(2769.34,428.3) 2850.9,428.3 2864.4,414.8 2871.63,414.8 2874.91,411.52 2954.61,411.52 2966.33,399.8 2966.33,274.93 2947,255.6 2947,148.64 2930.25,131.89 2890.22,131.89 J42.1@2889.81,131.48
NetC302_1: C302.1 U42.2 | length 176.3
  Top Layer w10: C302.1@2349.11,71.45 2355.91,64.65 2372.55,64.65 2381.81,55.39 2381.81,21.62 2404.68,-1.26 2421.94,-1.26 2445.91,-25.23 U42.2@2445.91,-44.91
NetC303_1: C303.1 C304.1 C305.1 C306.1 C307.1 R347.2 R348.2 U46.6 | length 714.1
  Bottom Layer w15: C303.1@2536.71,124.15 2630.73,124.15 2653.41,146.83 U46.6@2653.41,166.51
  Bottom Layer w20: C307.1@2435.81,292.77 2451.75,276.83 2451.75,273.11 2475.61,249.25 2522.28,249.25 C305.1@2536.71,234.82 ; C306.1@2474.55,-68.45 2487.38,-55.62 2487.38,-33.96 2536.71,15.37 C304.1@2536.71,29.15 2536.71,124.15 C305.1@2536.71,234.82 ; R348.2@2545.01,343.65 2536.71,335.35 C305.1@2536.71,234.82
NetC308_2: C308.2 R349.1 | length 35
  Bottom Layer w20: C308.2@2534.11,-83.65 2534.29,-83.83 2568.83,-83.83 R349.1@2569.01,-84.01
NetC309_2: C309.2 R350.1 | length 35.2
  Bottom Layer w20: R350.1@2692.27,-94.65 2692.67,-94.25 2726.71,-94.25 C309.2@2727.11,-93.85
NetC310_1: C310.1 J43.2 L29.2 R213.1 | length 359.1
  Top Layer w20: v1(2822,383.8) 2885.37,447.17 J43.2@2889.68,447.17
  Bottom Layer w15: L29.2@2668.71,300.75 2696.11,300.75 C310.1@2713.71,283.15
  Bottom Layer w20: L29.2@2668.71,300.75 2668.71,343.75 2686.23,361.26 2799.46,361.26 v1(2822,383.8)
NetC311_1: C311.1 J43.1 L28.2 R212.1 | length 507.2
  Top Layer w20: J43.1@2889.68,368.43 2928.98,407.73 2961.6,407.73 R212.1@2971.6,417.73
  Bottom Layer w15: L28.2@2609.11,300.75 2636.36,273.5 2670.82,273.5 2684.47,259.85 2697.71,259.85 C311.1@2712.81,244.75
  Bottom Layer w20: C311.1@2712.81,244.75 2726.37,231.19 2726.37,227.15 2736.57,216.95 2779.98,216.95 2791.7,228.66 2791.7,270.45 J43.1@2889.68,368.43
NetC312_1: C312.1 U46.2 | length 175.8
  Bottom Layer w15: U46.2@2703.41,-38.21 2703.41,-18.73 2723.67,1.53 2744.26,1.53 2767.36,24.63 2767.36,73.96 v1(2785.1,91.7)
NetD15_1: D15.1 J12.1 R129.2 | length 150.1
  Bottom Layer w20: R129.2@-163.9,2812.2 -160.8,2809.1 -109.33,2809.1 D15.1@-106.23,2806 ; D15.1@-106.23,2809.94 -69.53,2846.64 J12.1@-69.53,2880 -69.53,2883.13 J12.1@-70.6,2884.2
NetD49_1: D49.1 R354.1 | length 151.8
  Bottom Layer w12: D49.1@1646.77,3678.04 1629.15,3660.42 1629.15,3641.9 1628.9,3641.64 1628.9,3583.04 1643.98,3567.96 R354.1@1672.1,3567.96
NetD79_2: D79.2 J11.4 Q3.2 | length 58.6
  Top Layer w20: v1(2626.91,841.28) 2657.77,841.28 Q3.2@2677.41,860.92
NetD80_2: D80.2 J11.3 Q4.2 | length 117.3
  Top Layer w20: Q4.2@2697.51,588.22 2705.51,580.22 2705.51,558.22 v1(2709.71,554.02)
  Bottom Layer w20: J11.3@2650.47,583.1 2650.47,571.58 2668.03,554.02 v1(2709.71,554.02)
NetF1_1: F1.1 J5.4 | length 159
  Top Layer w20: J5.4@-441.65,2808.8 -405.79,2808.8 -393.66,2820.93 F1.1@-287.7,2820.93
NetH2_3: H2.3 R35.2 | length 142.8
  Bottom Layer w6.16: v1(2688.7,1302.3) 2691,1300 2797.92,1300 R35.2@2821.02,1323.1
NetH2_4: H2.4 R40.1 | length 515
  Top Layer w6.16: v1(2523,1342.9) 2523,1317.18 2537.88,1302.3 H2.4@2557.5,1302.3
  Bottom Layer w6.16: R40.1@2311.1,1029.72 2329.98,1048.6 2329.98,1097.42 2329.8,1097.6 2329.8,1230.8 2338.3,1239.3 2357.7,1239.3 2365.3,1246.9 2410.6,1246.9 2505.69,1341.99 2522.09,1341.99 v1(2523,1342.9)
NetH2_5: H2.5 R110.2 | length 138.5
  Bottom Layer w6.16: v1@2689.6,1377.2 2690.58,1377.2 2705.08,1391.7 R110.2@2821.02,1391.7
  Bottom Layer w12: v1(2691.6,1380.7) v1@2692.35,1379.95
NetH2_6: H2.6 R111.1 | length 262.2
  Top Layer w6.16: v1(2444,1248.4) 2467.4,1248.4 2489,1226.8 R111.1@2489,1201.28
  Bottom Layer w6.16: v1(2444,1248.4) 2489.26,1293.66 2495.19,1293.66 2554.2,1352.67 v1(2554.2,1382)
NetH2_7: H2.7 R193.2 | length 137
  Bottom Layer w6.16: v1(2682.6,1461.5) 2819.3,1461.5 R193.2@2819.5,1461.7
NetH2_8: H2.8 R194.1 | length 148
  Top Layer w6.16: R194.1@2497,1332.68 2497,1424.66 2531.64,1459.3 H2.8@2538.7,1459.3
NetH3_1: H3.1 R195.2 | length 111.2
  Top Layer w6.16: v1(2686.2,947.38) 2686.2,909.06 H3.1@2686.5,908.76
  Bottom Layer w12: v1(2686.2,947.38) 2714.99,947.38 2718.27,944.09 2754.31,944.09 R195.2@2756.42,946.2
NetH3_2: H3.2 R196.1 | length 78.8
  Top Layer w6.16: R196.1@2481.7,908.8 2560.47,908.8 H3.2@2560.51,908.76
NetH3_3: H3.3 R197.2 | length 97.2
  Top Layer w6.16: H3.3@2686.5,987.5 2686.5,1011.9 v1@2688.2,1013.6
  Bottom Layer w12: v1(2687.1,1019.3) 2687.35,1019.55 2757.07,1019.55 R197.2@2757.32,1019.8
NetH3_4: H3.4 R198.1 | length 84.1
  Top Layer w6.16: R198.1@2479.88,984.4 2558.3,984.4 H3.4@2562.3,988.4
NetH3_5: H3.5 R199.2 | length 102.7
  Top Layer w6.16: H3.5@2686.5,1066.24 2687.2,1066.94 v1(2687.2,1097.13)
  Bottom Layer w12: v1(2687.2,1097.13) 2715.9,1097.13 2719.27,1100.5 2756.92,1100.5 R199.2@2757.22,1100.2
NetJ5_1: J5.1 J5.5 L1.1 | length 637.3
  Bottom Layer w12: J5.5@-727.15,3176.9 -754.7,3176.9 -837.4,3094.2 -837.4,2813.6 -817.3,2793.5 -729.55,2793.5 J5.1@-727.15,2791.1 -725.35,2792.9 -637.84,2792.9 L1.1@-636.04,2794.7
NetJ7_11: J7.11 R64.1 | length 89.8
  Bottom Layer w12: R64.1@-790.7,433.8 -790.07,433.17 -702.06,433.17 -701.42,432.53
NetJ7_13: J7.13 R66.1 | length 105.4
  Bottom Layer w12: J7.13@-692.2,44.7 -692.2,37.9 -662.2,7.9 R66.1@-608.1,7.9 R66.1@-609.58,9.38
NetJ8_1: J8.1 J8.2 J8.3 J8.4 J8.@574.96,3499.08 J8.@894.64,3499.08 L12.1 | length 889.3
  Layer 4 w6.16: J8.4@567.5,3476.2 571.48,3480.18 J8.1@904.88,3480.18
  Bottom Layer w6.16: J8.4@564.72,3480.18 J8.3@564.72,3659.32 707.32,3659.32 710.93,3662.93 710.93,3670.63 723.25,3682.95 730.95,3682.95 739.3,3691.3 802.4,3691.3 834.38,3659.32 J8.2@904.88,3659.32
NetJ9_19: J9.19 J9.20 J9.21 J9.22 L11.1 | length 1118.4
  Top Layer w12: J9.20@1055.52,3205.03 J9.19@1055.52,3428.63 1224.97,3428.63 1259.9,3393.7 v1(1290.7,3393.7) ; J9.21@1572.92,3205.03 J9.22@1572.92,3428.63
  Bottom Layer w6.16: J9.22@1572.92,3428.63 1591.75,3409.8 1591.75,3329.5 L11.1@1604.42,3316.83
  Bottom Layer w12: v1(1290.7,3393.7) 1399.49,3393.7 1434.41,3428.63 J9.22@1572.92,3428.63
NetJ11_2: J11.2 R327.1 | length 4.5
  Top Layer w20: v1(2773.02,557.37) 2775.57,554.82 R327.1@2776.43,554.82
NetJ13_52: J13.52 R144.1 | length 67.5
  Bottom Layer w6.16: J13.52@936.45,542.93 994.03,542.93 R144.1@1001.01,535.95
NetJ13_53: J13.53 R145.2 | length 81.1
  Bottom Layer w6.16: R145.2@564.97,549.65 581.53,533.09 J13.53@639.2,533.09
NetJ13_55: J13.55 R147.2 R148.2 | length 109.6
  Bottom Layer w6.16: R147.2@564.97,480.75 R148.2@564.97,515.35 566.92,513.4 J13.55@639.2,513.4
NetJ13_56: J13.56 R146.1 | length 65.3
  Bottom Layer w6.16: J13.56@936.45,503.56 998.9,503.56 R146.1@1000.91,501.55
NetJ16_G1: J16.G1 J16.G2 J16.G3 J16.G4 R156.1 | length 1435.9
  Top Layer w6.16: J16.G1@2658.6,2942 2669.5,2931.1 2669.5,2861.5 2654.3,2846.31 2654.3,2807.7 2661.9,2800.1 2828.3,2800.1 2925.41,2897.21 J16.G3@2925.41,3070.84 ; J16.G1@2665.3,2954.81 J16.G1@2674.2,2945.91
  Bottom Layer w6.16: R156.1@2618.7,3357.11 2635.3,3340.51 J16.G2@2663.3,3340.51 ; J16.G1@2669.5,2948.79 J16.G2@2669.5,3322.81 2669.5,3324.11 J16.G2@2673.5,3328.11 ; J16.G3@2925.41,3070.84 2925.41,3421.02 J16.G4@2930.7,3426.31
NetJ17_G1: J17.G1 J17.G2 J17.G3 J17.G4 R177.1 | length 1516.6
  Top Layer w6.16: J17.G1@1986,2947.29 2006.15,2927.14 2090.91,2927.14 2200.76,3036.99 2219.29,3036.99 2241.91,3059.6 J17.G3@2241.91,3069.34 ; J17.G2@1986,3321.31 1986,3345.53 2062.98,3422.51 2104.08,3422.51 2170.6,3489.03 v1(2170.86,3489.03)
  Bottom Layer w6.16: R177.1@1929.99,2910.34 1963.38,2910.34 1986,2932.95 J17.G1@1986,2947.29 J17.G2@1986,3321.31 ; v1(2170.86,3489.03) 2186.42,3489.03 2206.97,3468.48 2219.29,3468.48 2241.91,3445.86 J17.G4@2241.91,3423.68 J17.G3@2241.91,3069.34
NetJ19_10: J19.10 R236.1 | length 75.1
  Bottom Layer w12: J19.10@-58.2,1830.09 -58.11,1830.19 15.41,1830.19 R236.1@16.42,1831.2
NetJ19_38: J19.38 R237.1 | length 75.3
  Bottom Layer w12: J19.38@-58.2,1554.5 -33.78,1554.5 -32.38,1553.1 R237.1@16.54,1553.1
NetJ20_B11: J20.B11 R247.2 | length 292.7
  Bottom Layer w6.16: J20.B11@-720.5,2247.5 -694,2274 -592.6,2274 -531.1,2212.5 R247.2@-464.28,2212.5
NetJ20_B12: J20.B12 R248.2 | length 371
  Bottom Layer w6.16: J20.B12@-809.8,2124.3 -808.29,2125.82 -638.49,2125.82 -607,2157.3 -495.18,2157.3 R248.2@-464.98,2127.1
NetJ20_B17: J20.B17 J20.B31 R137.2 R328.2 | length 872.8
  Top Layer w6.16: v1(-766.3,1767.8) -766.3,1886.74 J20.B17@-722.9,1930.14
  Bottom Layer w6.16: v1(-766.3,1767.8) -766.3,1436.2 -759.6,1429.5 -759.6,1415.66 J20.B31@-722.9,1378.96 ; J20.B17@-723.4,1932 -715.21,1923.81 -692.01,1923.81 -663.2,1895 -603.2,1895 -574.9,1923.3 v1(-464.78,1923.3)
NetL7_1: L7.1 U3.30 | length 116.2
  Top Layer w10: U3.30@281.32,522.98 281.32,547.04
  Top Layer w12: 281.32,547.04 291.36,557.08 334.66,557.08 350.66,573.08 L7.1@350.66,585.08
NetL19_1: L19.1 U42.5 | length 56.3
  Top Layer w15: U42.5@2545.91,159.81 2546.05,159.95 2546.05,210.19 L19.1@2550.21,214.35
NetL27_1: L27.1 U42.8 | length 140.4
  Top Layer w15: U42.8@2395.91,159.81 2396.15,160.05 2396.15,179.74 2415.36,198.95 2446.01,198.95 2462.71,215.65 L27.1@2501.61,215.65
NetL28_1: L28.1 U46.5 | length 73.6
  Bottom Layer w15: U46.5@2603.41,166.51 2603.55,166.65 2603.55,232.19 L28.1@2609.11,237.75
NetL29_1: L29.1 U46.8 | length 135.5
  Bottom Layer w15: L29.1@2658.81,237.75 2681.81,214.75 2704.1,214.75 2732.51,186.34 2753.06,186.34 2753.41,185.99 U46.8@2753.41,166.51
NetLED1_1: LED1.1 R11.2 | length 1.4
  Top Layer w6.16: v1(1858.6,-64.8) 1859.4,-64 LED1.1@1859.7,-64